# Altium PCB 180222.PcbDoc (part 3 of 5)
Units mil, origin at the board's own origin, x right, y up, seen from the top; angles counter-clockwise.
Board outline 6880.23 x 4505.03 mil, 2 copper layers (Top Layer, Bottom Layer); 136 components, 176 nets, 656 pads, 225 vias.
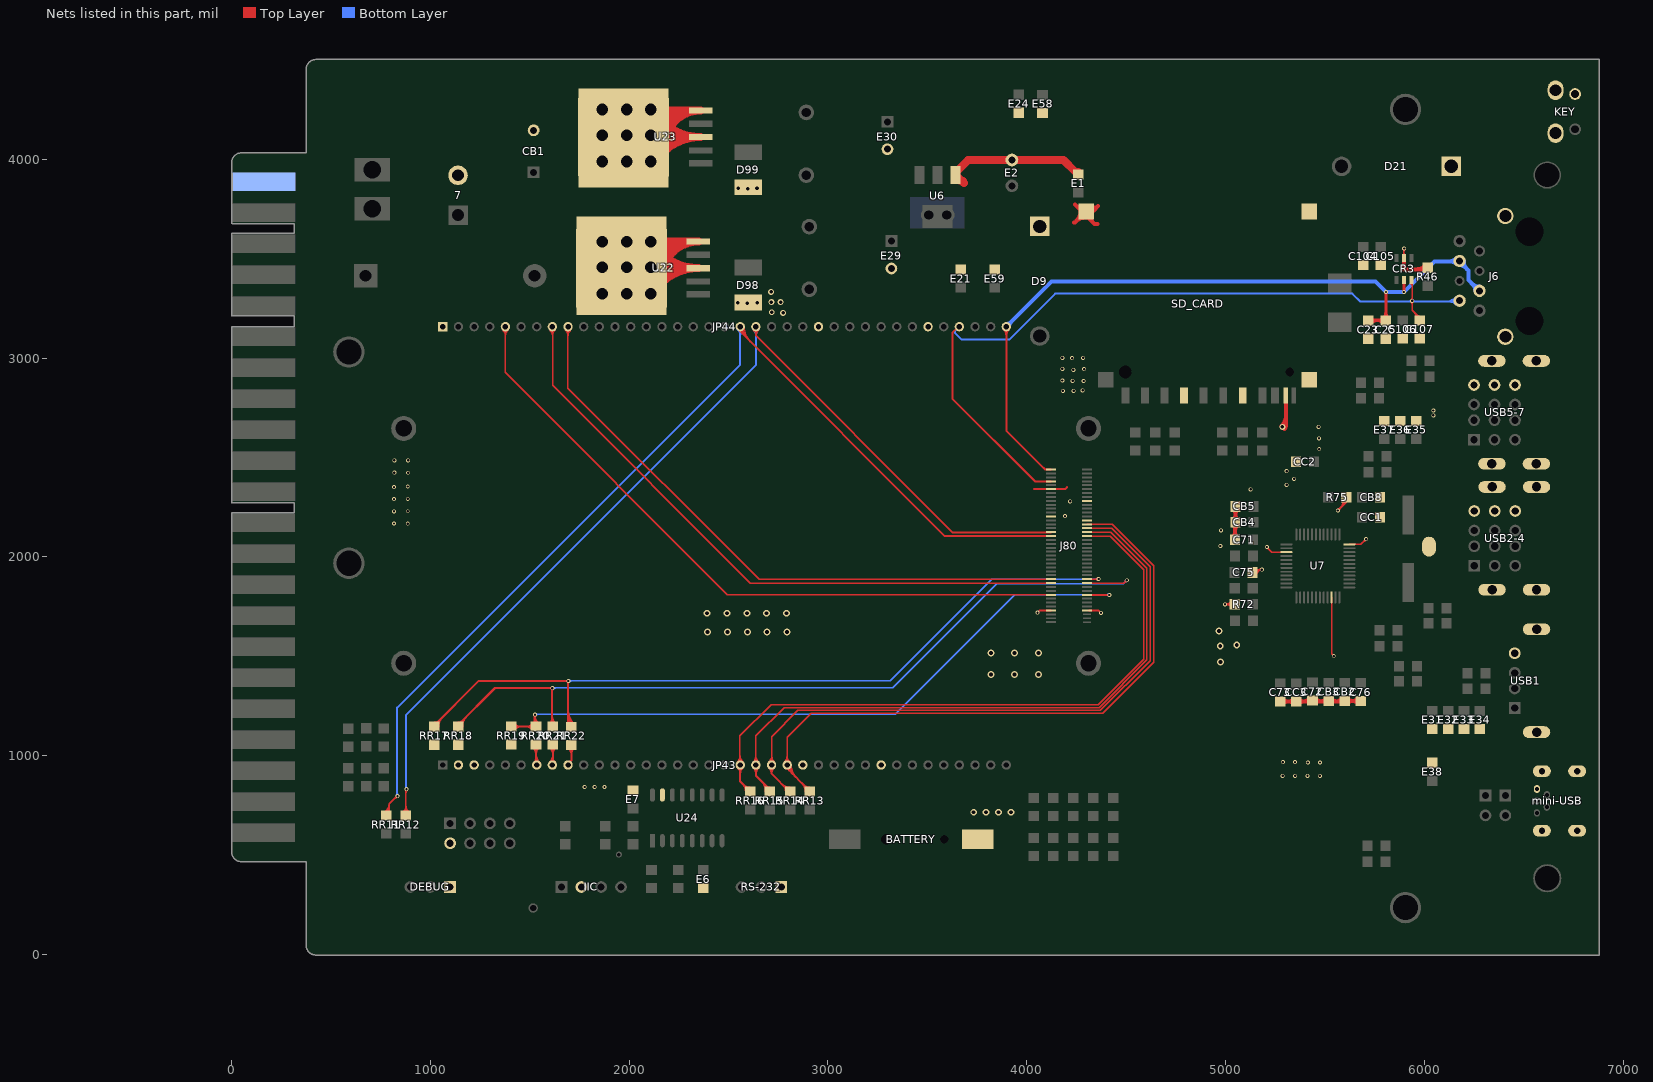
[diagram p3: the nets of this part, all layers, seen from the top]

## Via types
v1: diameter 20, hole 12, Top Layer to Bottom Layer, 169 vias
v2: diameter 30, hole 18, Top Layer to Bottom Layer, 30 vias
v3: diameter 35, hole 20, Top Layer to Bottom Layer, 25 vias
v4: diameter 50, hole 28, Top Layer to Bottom Layer, 1 vias

## Nets (pads, with @x,y where several pads share a name; then routed paths per layer and width w, separated by ;. In a path a pad name is that pad's centre, name@x,y a point inside that pad or via, vN(x,y) a via of type N, cw(c..) or ccw(c..) an arc to the next point about the centre after c; other vN are vias at no path point) (continued)
ETX-: C107.2 CR3.3 J6.2 J80.44 JP44.34 | length 4962.2
  Top Layer w7: CR3.3@5939,3394 5939,3241 C107.2@5978,3202 ; C107.2@5978,3186 C107.2@5978,3189.65 C107.2@5978,3210 ; CR3.3@5930.92,3379.67 cw(c5911.4,3360.16) 5939,3360.16 ; CR3.3@5930.92,3379.67 cw(c5911.4,3360.16) 5939,3360.16 ; CR3.3@5930.92,3379.67 cw(c5911.4,3360.16) 5939,3360.16 ; v1@5934.4,3283.4 cw(c5923.31,3272.31) 5939,3272.31 ; v1@5934.4,3283.4 cw(c5923.31,3272.31) 5939,3272.31 ; v1@5934.4,3283.4 cw(c5923.31,3272.31) 5939,3272.31 ; v1@5934.4,3292.6 ccw(c5923.31,3303.69) 5939,3303.69 ; v1@5934.4,3292.6 ccw(c5923.31,3303.69) 5939,3303.69 ; v1@5934.4,3292.6 ccw(c5923.31,3303.69) 5939,3303.69 ; 5939,3272.31 cw(c5954.69,3272.31) v1@5943.6,3283.4 ; 5939,3272.31 cw(c5954.69,3272.31) v1@5943.6,3283.4 ; 5939,3272.31 cw(c5954.69,3272.31) v1@5943.6,3283.4 ; 5939,3303.69 ccw(c5954.69,3303.69) v1@5943.6,3292.6 ; 5939,3303.69 ccw(c5954.69,3303.69) v1@5943.6,3292.6 ; 5939,3303.69 ccw(c5954.69,3303.69) v1@5943.6,3292.6 ; 5943.74,3236.26 cw(c5899.72,3192.25) C107.2@5961.93,3190.15 ; 5943.74,3236.26 cw(c5899.72,3192.25) C107.2@5961.93,3190.15 ; 5943.74,3236.26 cw(c5899.72,3192.25) C107.2@5961.93,3190.15 ; 5955.14,3224.86 cw(c5921.78,3191.5) C107.2@5968.93,3189.92 ; 5955.14,3224.86 cw(c5921.78,3191.5) C107.2@5968.93,3189.92 ; 5955.14,3224.86 cw(c5921.78,3191.5) C107.2@5968.93,3189.92 ; 5962.07,3217.93 ccw(c5977.01,3232.87) C107.2@5977.01,3211.74 ; 5962.07,3217.93 ccw(c5977.01,3232.87) C107.2@5977.01,3211.74 ; 5962.07,3217.93 ccw(c5977.01,3232.87) C107.2@5977.01,3211.74 ; C107.2@5966.54,3213.46 cw(c5943.85,3190.76) C107.2@5975.93,3189.68 ; C107.2@5966.54,3213.46 cw(c5943.85,3190.76) C107.2@5975.93,3189.68 ; C107.2@5966.54,3213.46 cw(c5943.85,3190.76) C107.2@5975.93,3189.68
  Top Layer w10: JP44.34@3658,3159 3626.5,3127.5 3626.5,2796.54 4042.24,2380.8 J80.44@4122.45,2380.8
  Bottom Layer w10: JP44.34@3661.82,3158.36 3639,3135.55 3639,3128 3673.32,3093.68 3912.68,3093.68 4143.5,3324.5 5639.13,3324.5 5679.63,3284 J6.2@6183,3284 ; 6127.3,3284 cw(c6127.3,3238.3) 6159.62,3270.62 ccw(c6127.3,3238.3) 6127.3,3284 ; 6127.3,3284 ccw(c6127.3,3339.7) 6166.69,3300.31 cw(c6127.3,3339.7) 6127.3,3284 ; 5917.27,3284 ccw(c5917.27,3309.73) 5935.46,3291.54 cw(c5917.27,3309.73) 5917.27,3284 ; v1@5942.53,3291.54 ccw(c5960.73,3309.73) 5960.73,3284 cw(c5960.73,3309.73) v1@5942.53,3291.54 ; 6103.16,3284 ccw(c6103.16,3363.84) 6159.62,3307.38 cw(c6103.16,3363.84) 6103.16,3284
  other v1: 5939,3288
EVDDA: C23.1 C25.2 CR3.2 J6.3 J6.6 J80.41 JP44.37 | length 5517.8
  Top Layer w7: JP44.37@3899,3158.36 JP44.37@3899,3163
  Top Layer w10: JP44.37@3898,3159 3898,2635 4093.14,2439.86 J80.41@4122.45,2439.86 ; JP44.37@3884.87,3145.19 cw(c3853.17,3113.49) 3898,3113.49 ; JP44.37@3884.87,3145.19 cw(c3853.17,3113.49) 3898,3113.49 ; JP44.37@3884.87,3145.19 cw(c3853.17,3113.49) 3898,3113.49 ; 3898,3113.31 cw(c3943.08,3113.31) JP44.37@3911.21,3145.19 ; 3898,3113.31 cw(c3943.08,3113.31) JP44.37@3911.21,3145.19 ; 3898,3113.31 cw(c3943.08,3113.31) JP44.37@3911.21,3145.19 ; 4086.34,2446.66 ccw(c4102.76,2463.09) 4102.76,2439.86 cw(c4102.76,2463.09) 4086.34,2446.66
  Top Layer w15: C23.1@5717,3191 5803,3191 C25.2@5807,3187 ; C25.2@5807,3191 v1@5807,3333 ; v1(5898,3333) CR3.2@5898,3394 ; C23.1@5732.78,3175.11 cw(c5771.13,3136.76) 5771.13,3191 ; C23.1@5732.78,3175.11 cw(c5771.13,3136.76) 5771.13,3191 ; C23.1@5732.78,3175.11 cw(c5771.13,3136.76) 5771.13,3191 ; C23.1@5732.78,3200.7 ccw(c5756.19,3224.11) 5756.19,3191 ; C23.1@5732.78,3200.7 ccw(c5756.19,3224.11) 5756.19,3191 ; C23.1@5732.78,3200.7 ccw(c5756.19,3224.11) 5756.19,3191 ; 5755.66,3191 cw(c5755.66,3139.29) C25.2@5792.22,3175.85 ; 5755.66,3191 cw(c5755.66,3139.29) C25.2@5792.22,3175.85 ; 5755.66,3191 cw(c5755.66,3139.29) C25.2@5792.22,3175.85 ; 5767.02,3191 ccw(c5767.02,3226.64) C25.2@5792.22,3201.44 ; 5767.02,3191 ccw(c5767.02,3226.64) C25.2@5792.22,3201.44 ; 5767.02,3191 ccw(c5767.02,3226.64) C25.2@5792.22,3201.44 ; C25.2@5794.19,3201.44 ccw(c5763.27,3232.36) 5807,3232.36 ; C25.2@5794.19,3201.44 ccw(c5763.27,3232.36) 5807,3232.36 ; C25.2@5794.19,3201.44 ccw(c5763.27,3232.36) 5807,3232.36 ; 5807,3232.28 ccw(c5850.62,3232.28) C25.2@5819.78,3201.44 ; 5807,3232.28 ccw(c5850.62,3232.28) C25.2@5819.78,3201.44 ; 5807,3232.28 ccw(c5850.62,3232.28) C25.2@5819.78,3201.44
  Bottom Layer w20: JP44.37@3898.04,3158.36 4124.68,3385 5730,3385 ; 5723,3385 5756,3385 v1(5808,3333) v1(5898,3333) 6052,3487 J6.6@6176,3487 ; J6.6@6174,3489 J6.6@6176,3487 ; J6.6@6177,3487 J6.6@6176,3487 ; J6.3@6272,3343 6222,3393 6222,3441 J6.6@6176,3487 ; JP44.37@3898.04,3171.98 ccw(c3898.04,3204.87) 3921.29,3181.62 ; JP44.37@3898.04,3171.98 ccw(c3898.04,3204.87) 3921.29,3181.62 ; JP44.37@3898.04,3171.98 ccw(c3898.04,3204.87) 3921.29,3181.62 ; JP44.37@3911.66,3158.36 cw(c3944.55,3158.36) 3921.29,3181.62 ; JP44.37@3911.66,3158.36 cw(c3944.55,3158.36) 3921.29,3181.62 ; JP44.37@3911.66,3158.36 cw(c3944.55,3158.36) 3921.29,3181.62 ; 6122.47,3487 ccw(c6122.47,3544.53) J6.6@6163.15,3503.85 ; 6122.47,3487 ccw(c6122.47,3544.53) J6.6@6163.15,3503.85 ; 6122.47,3487 ccw(c6122.47,3544.53) J6.6@6163.15,3503.85 ; 6132.13,3487 cw(c6132.13,3443.13) J6.6@6163.15,3474.15 ; 6132.13,3487 cw(c6132.13,3443.13) J6.6@6163.15,3474.15 ; 6132.13,3487 cw(c6132.13,3443.13) J6.6@6163.15,3474.15 ; J6.6@6178,3468 cw(c6178,3426.96) 6207.02,3455.98 ; J6.6@6178,3468 cw(c6178,3426.96) 6207.02,3455.98 ; J6.6@6178,3468 cw(c6178,3426.96) 6207.02,3455.98 ; J6.6@6199,3489 ccw(c6259.36,3489) 6216.68,3446.32 ; J6.6@6199,3489 ccw(c6259.36,3489) 6216.68,3446.32 ; J6.6@6199,3489 ccw(c6259.36,3489) 6216.68,3446.32 ; 6238.74,3376.26 ccw(c6278,3415.53) J6.3@6278,3360 ; 6238.74,3376.26 ccw(c6278,3415.53) J6.3@6278,3360 ; 6238.74,3376.26 ccw(c6278,3415.53) J6.3@6278,3360 ; 6243.56,3371.44 cw(c6211.13,3339) J6.3@6257,3339 ; 6243.56,3371.44 cw(c6211.13,3339) J6.3@6257,3339 ; 6243.56,3371.44 cw(c6211.13,3339) J6.3@6257,3339
GND: 7.2 ?.1@1100,560 BATTERY.2 C23.2 C25.1 C71.2 C72.2 C73.2 C75.2 C76.2 C104.1 C105.1 C106.1 C107.1 CB1.2 CB2.2 CB3.2 CB4.2 CB5.2 CB8.2 CC1.2 CC2.2 CC3.2 CR3.5 D9.1 D21.1 D98.1 D99.1 DEBUG.1 E1.2 E2.2 E6.2 E7.1 E21.1 E24.2 E29.2@3320,3451.1 E30.2@3300,4051.1 E31.2 E32.2 E33.2 E34.2 E35.2 E36.2 E37.2 E38.2 E58.1 E59.1 IIC.2 J6.13 J6.14 J80.4 J80.27 J80.32 J80.46 J80.53 J80.77 JP43.2 JP43.3 JP43.24 JP43.29 JP44.1 JP44.25 JP44.32 KEY.1 KEY.3 KEY.4 mini-USB.5 mini-USB.6 pad.0@1773,3453 pad.0@1783,4113 pad.0@1961,3673 pad.0@1962,3256 pad.0@1972,3898 pad.0@1973,4318 pad.0@1983,4123 pad.0@1989,3453 pad.0@6024,2052 pad.2@1865,3586 pad.2@1865,4251 pad.2@1988,3586 pad.2@1988,4251 pad.2@2110,3586 pad.2@2110,4251 pad.3@1865,3457 pad.3@1865,4122 pad.3@1988,3457 pad.3@1988,4122 pad.3@2110,3457 pad.3@2110,4122 pad.4@1865,3324 pad.4@1865,3989 pad.4@1988,3324 pad.4@1988,3989 pad.4@2110,3324 pad.4@2110,3989 pad.A R46.1 R72.2 R75.1 RR17.2 RR18.2 RR19.2 RS-232.1 SD_CARD.3 SD_CARD.6 SD_CARD.11 SD_CARD.13 SD_CARD.14 SD_CARD.15 U6.1 U7.10 U7.24 U7.39 U22.0 U22.3 U22.5 U23.0 U23.3 U23.5 U24.15 USB1.4 USB1.5 USB1.6 USB2-4.4 USB2-4.8 USB2-4.12 USB2-4.13 USB2-4.14 USB2-4.15 USB2-4.16 USB5-7.4 USB5-7.8 USB5-7.12 USB5-7.13 USB5-7.14 USB5-7.15 USB5-7.16 | length 24308.1
  Top Layer w7: R72.2@5047.35,1762 v1(4998,1762) ; C75.2@5136.65,1922 5149.65,1935 v1@5183,1935 ; v1@5204,2053 5232.75,2024.25 U7.39@5306.42,2024.25 ; U7.10@5533.78,1796.89 5533.78,1513.22 5546,1501 v1(5545,1501) ; v1(5566,2234) 5607.91,2275.91 R75.1@5607.91,2300 ; U7.24@5623.35,2063.62 5681.62,2063.62 v1(5708,2090) ; CR3.5@5898,3504 v1@5898,3549 ; v1(4998,1762) cw(c4998,1717.91) R72.2@5030.88,1747.28 ; v1(4998,1762) ccw(c4998,1806.08) R72.2@5030.88,1776.72 ; v1(4998,1762) cw(c4998,1717.91) R72.2@5030.88,1747.28 ; v1(4998,1762) ccw(c4998,1806.08) R72.2@5030.88,1776.72 ; v1(4998,1762) ccw(c4998,1806.08) R72.2@5030.88,1776.72 ; v1(4998,1762) cw(c4998,1717.91) R72.2@5030.88,1747.28 ; v1@5002.6,1757.4 cw(c5013.69,1746.31) 5013.69,1762 ; v1@5002.6,1757.4 cw(c5013.69,1746.31) 5013.69,1762 ; v1@5002.6,1757.4 cw(c5013.69,1746.31) 5013.69,1762 ; v1@5002.6,1766.6 ccw(c5013.69,1777.69) 5013.69,1762 ; v1@5002.6,1766.6 ccw(c5013.69,1777.69) 5013.69,1762 ; v1@5002.6,1766.6 ccw(c5013.69,1777.69) 5013.69,1762 ; 5013.64,1762 cw(c5013.64,1731.88) R72.2@5036.1,1751.95 ; 5013.64,1762 ccw(c5013.64,1792.11) R72.2@5036.1,1772.05 ; 5013.64,1762 cw(c5013.64,1731.88) R72.2@5036.1,1751.95 ; 5013.64,1762 ccw(c5013.64,1792.11) R72.2@5036.1,1772.05 ; 5013.64,1762 ccw(c5013.64,1792.11) R72.2@5036.1,1772.05 ; 5013.64,1762 cw(c5013.64,1731.88) R72.2@5036.1,1751.95 ; 5164.89,1935 ccw(c5164.89,1954.11) v1@5178.4,1940.6 ; 5164.89,1935 ccw(c5164.89,1954.11) v1@5178.4,1940.6 ; 5164.89,1935 ccw(c5164.89,1954.11) v1@5178.4,1940.6 ; 5169.72,1935 cw(c5169.72,1922.72) v1@5178.4,1931.4 ; 5169.72,1935 cw(c5169.72,1922.72) v1@5178.4,1931.4 ; 5169.72,1935 cw(c5169.72,1922.72) v1@5178.4,1931.4 ; v1@5183,1935 ccw(c5183,1908.54) 5157.74,1916.41 cw(c5183,1908.54) v1@5183,1935 ; v1@5208,2043.5 cw(c5208,2030.22) 5217.39,2039.61 ; v1@5208,2043.5 cw(c5208,2030.22) 5217.39,2039.61 ; v1@5208,2043.5 cw(c5208,2030.22) 5217.39,2039.61 ; v1@5214.5,2050 ccw(c5232.61,2050) 5219.8,2037.2 ; v1@5214.5,2050 ccw(c5232.61,2050) 5219.8,2037.2 ; v1@5214.5,2050 ccw(c5232.61,2050) 5219.8,2037.2 ; v1@5566,2240.5 ccw(c5566,2256.19) 5577.1,2245.1 ; v1@5566,2240.5 ccw(c5566,2256.19) 5577.1,2245.1 ; v1@5566,2240.5 ccw(c5566,2256.19) 5577.1,2245.1 ; v1@5572.5,2234 cw(c5588.19,2234) 5577.1,2245.1 ; v1@5572.5,2234 cw(c5588.19,2234) 5577.1,2245.1 ; v1@5572.5,2234 cw(c5588.19,2234) 5577.1,2245.1 ; 5577.56,2245.56 ccw(c5547.28,2275.83) R75.1@5587.27,2291.12 ; 5577.56,2245.56 ccw(c5547.28,2275.83) R75.1@5587.27,2291.12 ; 5577.56,2245.56 ccw(c5547.28,2275.83) R75.1@5587.27,2291.12 ; 5585.19,2253.19 ccw(c5558.32,2280.05) R75.1@5593.81,2293.63 ; 5585.19,2253.19 ccw(c5558.32,2280.05) R75.1@5593.81,2293.63 ; 5585.19,2253.19 ccw(c5558.32,2280.05) R75.1@5593.81,2293.63 ; 5592.82,2260.82 ccw(c5569.36,2284.28) R75.1@5600.35,2296.13 ; 5592.82,2260.82 ccw(c5569.36,2284.28) R75.1@5600.35,2296.13 ; 5592.82,2260.82 ccw(c5569.36,2284.28) R75.1@5600.35,2296.13 ; 5600.45,2268.45 ccw(c5580.41,2288.5) R75.1@5606.89,2298.63 ; 5600.45,2268.45 ccw(c5580.41,2288.5) R75.1@5606.89,2298.63 ; 5600.45,2268.45 ccw(c5580.41,2288.5) R75.1@5606.89,2298.63 ; 5696.9,2078.9 cw(c5708,2067.81) v1@5708,2083.5 ; 5696.9,2078.9 ccw(c5685.81,2090) v1@5701.5,2090 ; 5696.9,2078.9 cw(c5708,2067.81) v1@5708,2083.5 ; 5696.9,2078.9 ccw(c5685.81,2090) v1@5701.5,2090 ; 5696.9,2078.9 ccw(c5685.81,2090) v1@5701.5,2090 ; 5696.9,2078.9 cw(c5708,2067.81) v1@5708,2083.5 ; CR3.5@5893.52,3518.33 ccw(c5882.69,3529.15) 5898,3529.15 ; CR3.5@5893.52,3518.33 ccw(c5882.69,3529.15) 5898,3529.15 ; CR3.5@5893.52,3518.33 ccw(c5882.69,3529.15) 5898,3529.15 ; v1@5894.4,3547.4 cw(c5885.72,3538.72) 5898,3538.72 ; v1@5894.4,3547.4 cw(c5885.72,3538.72) 5898,3538.72 ; v1@5894.4,3547.4 cw(c5885.72,3538.72) 5898,3538.72 ; 5898,3529.15 ccw(c5913.31,3529.15) CR3.5@5902.48,3518.33 ; 5898,3529.15 ccw(c5913.31,3529.15) CR3.5@5902.48,3518.33 ; 5898,3529.15 ccw(c5913.31,3529.15) CR3.5@5902.48,3518.33 ; 5898,3533.89 cw(c5917.11,3533.89) v1@5903.6,3547.4 ; 5898,3533.89 cw(c5917.11,3533.89) v1@5903.6,3547.4 ; 5898,3533.89 cw(c5917.11,3533.89) v1@5903.6,3547.4 ; C75.2@5144.37,1920.58 cw(c5163.97,1914.47) 5163.97,1935 ccw(c5163.97,1914.47) C75.2@5144.37,1920.58 ; C75.2@5151.05,1918.5 cw(c5173.48,1911.5) 5173.48,1935 ccw(c5173.48,1911.5) C75.2@5151.05,1918.5 ; C75.2@5152.27,1938.61 ccw(c5160.97,1947.31) 5160.97,1935 cw(c5160.97,1947.31) C75.2@5152.27,1938.61
  Top Layer w10: 4036.57,2341.43 J80.46@4122.45,2341.43 4193.43,2341.43 4204,2352 ; v1(4055,1720) 4066.2,1731.2 J80.77@4122.45,1731.2 ; J80.4@4313.55,1731.2 4360.8,1731.2 v1@4372,1720
  Top Layer w20: 4239,3683 4243,3683 4304,3744 4338,3744 4360,3766 cw(c4335.76,3790.24) SD_CARD.15@4316.49,3761.89 ; 4243,3774 4342,3675 4356,3675 ; 4245.78,3685.78 cw(c4299.98,3631.59) SD_CARD.15@4299.98,3708.23 ; 4251.52,3691.52 ccw(c4205.44,3737.6) SD_CARD.15@4270.61,3737.6 ; 4253.29,3763.71 ccw(c4269.38,3779.8) SD_CARD.15@4282.74,3761.38 ; SD_CARD.15@4305.24,3745.35 ccw(c4321.92,3769.89) 4342.91,3748.91 ; SD_CARD.15@4325.93,3723.84 ccw(c4354.9,3708.48) 4331.71,3685.29 ; C71.2@5048.35,2086 CB4.2@5048.35,2172 ; CB4.2@5050.35,2174 CB5.2@5050.35,2254 ; C73.2@5276,1273.35 CC3.2@5356,1273.35 5597,1273.35 CB2.2@5600,1276.35 ; 5303.91,2662.91 SD_CARD.11@5303.91,2812.4 ; CB2.2@5609.65,1275.35 C76.2@5680,1275.35 ; CR3.5@5898,3504 5898,3447 R46.1@6016,3447 ; C71.2@5037.33,2098.01 ccw(c5010.72,2124.62) 5048.35,2124.62 ; C71.2@5037.33,2098.01 ccw(c5010.72,2124.62) 5048.35,2124.62 ; C71.2@5037.33,2098.01 ccw(c5010.72,2124.62) 5048.35,2124.62 ; CB4.2@5039.33,2161.99 cw(c5017.54,2140.2) 5048.35,2140.2 ; CB4.2@5039.33,2161.99 cw(c5017.54,2140.2) 5048.35,2140.2 ; CB4.2@5039.33,2161.99 cw(c5017.54,2140.2) 5048.35,2140.2 ; CB4.2@5039.33,2186.01 ccw(c5012.72,2212.62) 5050.35,2212.62 ; CB4.2@5039.33,2186.01 ccw(c5012.72,2212.62) 5050.35,2212.62 ; CB4.2@5039.33,2186.01 ccw(c5012.72,2212.62) 5050.35,2212.62 ; CB5.2@5039.33,2241.99 cw(c5012.72,2215.38) 5050.35,2215.38 ; CB5.2@5039.33,2241.99 cw(c5012.72,2215.38) 5050.35,2215.38 ; CB5.2@5039.33,2241.99 cw(c5012.72,2215.38) 5050.35,2215.38 ; 5048.35,2124.62 ccw(c5085.99,2124.62) C71.2@5059.38,2098.01 ; 5048.35,2124.62 ccw(c5085.99,2124.62) C71.2@5059.38,2098.01 ; 5048.35,2124.62 ccw(c5085.99,2124.62) C71.2@5059.38,2098.01 ; 5048.35,2130.55 cw(c5092.82,2130.55) CB4.2@5061.38,2161.99 ; 5048.35,2130.55 cw(c5092.82,2130.55) CB4.2@5061.38,2161.99 ; 5048.35,2130.55 cw(c5092.82,2130.55) CB4.2@5061.38,2161.99 ; 5050.35,2212.62 ccw(c5087.99,2212.62) CB4.2@5061.38,2186.01 ; 5050.35,2212.62 ccw(c5087.99,2212.62) CB4.2@5061.38,2186.01 ; 5050.35,2212.62 ccw(c5087.99,2212.62) CB4.2@5061.38,2186.01 ; 5050.35,2215.38 cw(c5087.99,2215.38) CB5.2@5061.38,2241.99 ; 5050.35,2215.38 cw(c5087.99,2215.38) CB5.2@5061.38,2241.99 ; 5050.35,2215.38 cw(c5087.99,2215.38) CB5.2@5061.38,2241.99 ; v2@5282.46,2658.54 ccw(c5230.68,2710.32) 5303.91,2710.32 ; v2@5282.46,2658.54 ccw(c5230.68,2710.32) 5303.91,2710.32 ; v2@5282.46,2658.54 ccw(c5230.68,2710.32) 5303.91,2710.32 ; C73.2@5288.01,1262.33 cw(c5314.62,1235.72) 5314.62,1273.35 ; C73.2@5288.01,1262.33 cw(c5314.62,1235.72) 5314.62,1273.35 ; C73.2@5288.01,1262.33 cw(c5314.62,1235.72) 5314.62,1273.35 ; C73.2@5288.01,1284.38 ccw(c5314.62,1310.99) 5314.62,1273.35 ; C73.2@5288.01,1284.38 ccw(c5314.62,1310.99) 5314.62,1273.35 ; C73.2@5288.01,1284.38 ccw(c5314.62,1310.99) 5314.62,1273.35 ; 5296.61,2644.39 ccw(c5278.97,2662.03) 5303.91,2662.03 ; 5296.61,2644.39 ccw(c5278.97,2662.03) 5303.91,2662.03 ; 5296.61,2644.39 ccw(c5278.97,2662.03) 5303.91,2662.03 ; 5317.38,1273.35 cw(c5317.38,1235.72) CC3.2@5343.99,1262.33 ; 5317.38,1273.35 ccw(c5317.38,1310.99) CC3.2@5343.99,1284.38 ; 5317.38,1273.35 cw(c5317.38,1235.72) CC3.2@5343.99,1262.33 ; 5317.38,1273.35 ccw(c5317.38,1310.99) CC3.2@5343.99,1284.38 ; 5317.38,1273.35 ccw(c5317.38,1310.99) CC3.2@5343.99,1284.38 ; 5317.38,1273.35 cw(c5317.38,1235.72) CC3.2@5343.99,1262.33 ; CC3.2@5368.01,1262.33 cw(c5394.62,1235.72) 5394.62,1273.35 ; CC3.2@5368.01,1262.33 cw(c5394.62,1235.72) 5394.62,1273.35 ; CC3.2@5368.01,1262.33 cw(c5394.62,1235.72) 5394.62,1273.35 ; CC3.2@5368.01,1284.38 ccw(c5394.62,1310.99) 5394.62,1273.35 ; CC3.2@5368.01,1284.38 ccw(c5394.62,1310.99) 5394.62,1273.35 ; CC3.2@5368.01,1284.38 ccw(c5394.62,1310.99) 5394.62,1273.35 ; 5389.72,1273.35 ccw(c5389.72,1324.65) C72.2@5425.99,1288.38 ; 5389.72,1273.35 ccw(c5389.72,1324.65) C72.2@5425.99,1288.38 ; 5389.72,1273.35 ccw(c5389.72,1324.65) C72.2@5425.99,1288.38 ; 5409.03,1273.35 cw(c5409.03,1249.37) C72.2@5425.99,1266.33 ; 5409.03,1273.35 cw(c5409.03,1249.37) C72.2@5425.99,1266.33 ; 5409.03,1273.35 cw(c5409.03,1249.37) C72.2@5425.99,1266.33 ; C72.2@5450.01,1266.33 cw(c5466.97,1249.37) 5466.97,1273.35 ; C72.2@5450.01,1266.33 cw(c5466.97,1249.37) 5466.97,1273.35 ; C72.2@5450.01,1266.33 cw(c5466.97,1249.37) 5466.97,1273.35 ; C72.2@5450.01,1288.38 ccw(c5486.28,1324.65) 5486.28,1273.35 ; C72.2@5450.01,1288.38 ccw(c5486.28,1324.65) 5486.28,1273.35 ; C72.2@5450.01,1288.38 ccw(c5486.28,1324.65) 5486.28,1273.35 ; 5474.14,1273.35 ccw(c5474.14,1321.24) CB3.2@5507.99,1287.38 ; 5474.14,1273.35 ccw(c5474.14,1321.24) CB3.2@5507.99,1287.38 ; 5474.14,1273.35 ccw(c5474.14,1321.24) CB3.2@5507.99,1287.38 ; 5488.62,1273.35 cw(c5488.62,1245.96) CB3.2@5507.99,1265.33 ; 5488.62,1273.35 cw(c5488.62,1245.96) CB3.2@5507.99,1265.33 ; 5488.62,1273.35 cw(c5488.62,1245.96) CB3.2@5507.99,1265.33 ; CB3.2@5532.01,1265.33 cw(c5551.38,1245.96) 5551.38,1273.35 ; CB3.2@5532.01,1265.33 cw(c5551.38,1245.96) 5551.38,1273.35 ; CB3.2@5532.01,1265.33 cw(c5551.38,1245.96) 5551.38,1273.35 ; CB3.2@5532.01,1287.38 ccw(c5565.87,1321.24) 5565.87,1273.35 ; CB3.2@5532.01,1287.38 ccw(c5565.87,1321.24) 5565.87,1273.35 ; CB3.2@5532.01,1287.38 ccw(c5565.87,1321.24) 5565.87,1273.35 ; 5554.14,1273.35 ccw(c5554.14,1321.24) CB2.2@5587.99,1287.38 ; 5554.14,1273.35 ccw(c5554.14,1321.24) CB2.2@5587.99,1287.38 ; 5554.14,1273.35 ccw(c5554.14,1321.24) CB2.2@5587.99,1287.38 ; 5568.62,1273.35 cw(c5568.62,1245.96) CB2.2@5587.99,1265.33 ; 5568.62,1273.35 cw(c5568.62,1245.96) CB2.2@5587.99,1265.33 ; 5568.62,1273.35 cw(c5568.62,1245.96) CB2.2@5587.99,1265.33 ; CB2.2@5612.01,1265.33 cw(c5636.21,1241.13) 5636.21,1275.35 ; CB2.2@5612.01,1265.33 cw(c5636.21,1241.13) 5636.21,1275.35 ; CB2.2@5612.01,1265.33 cw(c5636.21,1241.13) 5636.21,1275.35 ; CB2.2@5612.01,1287.38 ccw(c5641.04,1316.41) 5641.04,1275.35 ; CB2.2@5612.01,1287.38 ccw(c5641.04,1316.41) 5641.04,1275.35 ; CB2.2@5612.01,1287.38 ccw(c5641.04,1316.41) 5641.04,1275.35 ; 5641.38,1275.35 cw(c5641.38,1237.72) C76.2@5667.99,1264.33 ; 5641.38,1275.35 ccw(c5641.38,1312.99) C76.2@5667.99,1286.38 ; 5641.38,1275.35 cw(c5641.38,1237.72) C76.2@5667.99,1264.33 ; 5641.38,1275.35 ccw(c5641.38,1312.99) C76.2@5667.99,1286.38 ; 5641.38,1275.35 ccw(c5641.38,1312.99) C76.2@5667.99,1286.38 ; 5641.38,1275.35 cw(c5641.38,1237.72) C76.2@5667.99,1264.33 ; 5960.29,3447 ccw(c5960.29,3511.63) R46.1@6005.99,3465.93 ; 5960.29,3447 ccw(c5960.29,3511.63) R46.1@6005.99,3465.93 ; 5960.29,3447 ccw(c5960.29,3511.63) R46.1@6005.99,3465.93
  Top Layer w39.37: U22.0@2082.38,3604.76 U22.0@2091.24,3613.62 ; U23.0@2082.38,4269.76 U23.0@2091.24,4278.62 ; U22.0@2102.14,3586.86 U22.5@2349.3,3586.86 ; U23.0@2109,4112 U23.3@2360.3,4112 ; U22.0@2116,3453 U22.3@2349.3,3453 ; U23.0@2126.86,4245.86 U23.5@2360.3,4245.86 ; U6.1@3646,3933 3646,3920 3674,3892 ; U6.1@3653,3944 3706,3997 E2.2@3926,3997 4185.68,3997 4244.68,3938 E1.2@4259,3938 ; U22.0@2012.81,3450.36 cw(c2169.04,3429.2) U22.0@2169.04,3586.86 ; U22.0@2012.81,3450.36 cw(c2169.04,3429.2) U22.0@2169.04,3586.86 ; U22.0@2012.81,3450.36 cw(c2169.04,3429.2) U22.0@2169.04,3586.86 ; U23.0@2023.81,4109.36 cw(c2180.04,4088.2) U23.0@2180.04,4245.86 ; U23.0@2023.81,4109.36 cw(c2180.04,4088.2) U23.0@2180.04,4245.86 ; U23.0@2023.81,4109.36 cw(c2180.04,4088.2) U23.0@2180.04,4245.86 ; U22.0@2051.82,3445.07 cw(c2214.1,3423.1) 2214.1,3586.86 ; U22.0@2051.82,3445.07 cw(c2214.1,3423.1) 2214.1,3586.86 ; U22.0@2051.82,3445.07 cw(c2214.1,3423.1) 2214.1,3586.86 ; U23.0@2062.82,4104.07 cw(c2225.1,4082.1) 2225.1,4245.86 ; U23.0@2062.82,4104.07 cw(c2225.1,4082.1) 2225.1,4245.86 ; U23.0@2062.82,4104.07 cw(c2225.1,4082.1) 2225.1,4245.86 ; U22.0@2071.82,3393.65 cw(c2191.07,3303.52) 2191.07,3453 ; U22.0@2071.82,3393.65 cw(c2191.07,3303.52) 2191.07,3453 ; U22.0@2071.82,3393.65 cw(c2191.07,3303.52) 2191.07,3453 ; U22.0@2071.82,3512.35 ccw(c2191.07,3602.48) 2191.07,3453 ; U22.0@2071.82,3512.35 ccw(c2191.07,3602.48) 2191.07,3453 ; U22.0@2071.82,3512.35 ccw(c2191.07,3602.48) 2191.07,3453 ; U23.0@2082.82,4052.65 cw(c2202.07,3962.52) 2202.07,4112 ; U23.0@2082.82,4052.65 cw(c2202.07,3962.52) 2202.07,4112 ; U23.0@2082.82,4052.65 cw(c2202.07,3962.52) 2202.07,4112 ; U23.0@2082.82,4171.35 ccw(c2202.07,4261.48) 2202.07,4112 ; U23.0@2082.82,4171.35 ccw(c2202.07,4261.48) 2202.07,4112 ; U23.0@2082.82,4171.35 ccw(c2202.07,4261.48) 2202.07,4112 ; U22.0@2090.83,3439.79 cw(c2259.16,3416.99) 2259.16,3586.86 ; U22.0@2090.83,3439.79 cw(c2259.16,3416.99) 2259.16,3586.86 ; U22.0@2090.83,3439.79 cw(c2259.16,3416.99) 2259.16,3586.86 ; U23.0@2101.83,4098.79 cw(c2270.16,4075.99) 2270.16,4245.86 ; U23.0@2101.83,4098.79 cw(c2270.16,4075.99) 2270.16,4245.86 ; U23.0@2101.83,4098.79 cw(c2270.16,4075.99) 2270.16,4245.86 ; U22.0@2103.23,3369.91 cw(c2270.18,3243.73) 2270.18,3453 ; U22.0@2103.23,3369.91 cw(c2270.18,3243.73) 2270.18,3453 ; U22.0@2103.23,3369.91 cw(c2270.18,3243.73) 2270.18,3453 ; U22.0@2103.23,3536.09 ccw(c2270.18,3662.27) 2270.18,3453 ; U22.0@2103.23,3536.09 ccw(c2270.18,3662.27) 2270.18,3453 ; U22.0@2103.23,3536.09 ccw(c2270.18,3662.27) 2270.18,3453 ; U23.0@2114.23,4028.91 cw(c2281.18,3902.73) 2281.18,4112 ; U23.0@2114.23,4028.91 cw(c2281.18,3902.73) 2281.18,4112 ; U23.0@2114.23,4028.91 cw(c2281.18,3902.73) 2281.18,4112 ; U23.0@2114.23,4195.09 ccw(c2281.18,4321.27) 2281.18,4112 ; U23.0@2114.23,4195.09 ccw(c2281.18,4321.27) 2281.18,4112 ; U23.0@2114.23,4195.09 ccw(c2281.18,4321.27) 2281.18,4112 ; U22.0@2126.7,3440.3 cw(c2157.37,3409.63) U22.0@2157.37,3453 ; U22.0@2126.7,3440.3 cw(c2157.37,3409.63) U22.0@2157.37,3453 ; U22.0@2126.7,3440.3 cw(c2157.37,3409.63) U22.0@2157.37,3453 ; U22.0@2126.7,3473.7 ccw(c2176.69,3523.69) U22.0@2176.69,3453 ; U22.0@2126.7,3473.7 ccw(c2176.69,3523.69) U22.0@2176.69,3453 ; U22.0@2126.7,3473.7 ccw(c2176.69,3523.69) U22.0@2176.69,3453 ; U22.0@2126.7,3569.3 cw(c2169.1,3526.9) U22.0@2169.1,3586.86 ; U22.0@2126.7,3569.3 cw(c2169.1,3526.9) U22.0@2169.1,3586.86 ; U22.0@2126.7,3569.3 cw(c2169.1,3526.9) U22.0@2169.1,3586.86 ; U22.0@2126.7,3602.7 ccw(c2164.96,3640.96) U22.0@2164.96,3586.86 ; U22.0@2126.7,3602.7 ccw(c2164.96,3640.96) U22.0@2164.96,3586.86 ; U22.0@2126.7,3602.7 ccw(c2164.96,3640.96) U22.0@2164.96,3586.86 ; U23.0@2126.7,4138.7 ccw(c2191.17,4203.17) U23.0@2191.17,4112 ; U23.0@2126.7,4138.7 ccw(c2191.17,4203.17) U23.0@2191.17,4112 ; U23.0@2126.7,4138.7 ccw(c2191.17,4203.17) U23.0@2191.17,4112 ; U23.0@2126.7,4234.3 cw(c2154.61,4206.39) U23.0@2154.61,4245.86 ; U23.0@2126.7,4234.3 cw(c2154.61,4206.39) U23.0@2154.61,4245.86 ; U23.0@2126.7,4234.3 cw(c2154.61,4206.39) U23.0@2154.61,4245.86 ; U23.0@2126.7,4267.7 ccw(c2179.44,4320.44) U23.0@2179.44,4245.86 ; U23.0@2126.7,4267.7 ccw(c2179.44,4320.44) U23.0@2179.44,4245.86 ; U23.0@2126.7,4267.7 ccw(c2179.44,4320.44) U23.0@2179.44,4245.86 ; U22.0@2129.85,3434.51 cw(c2304.22,3410.89) U22.5@2304.22,3586.86 ; U22.0@2129.85,3434.51 cw(c2304.22,3410.89) U22.5@2304.22,3586.86 ; U22.0@2129.85,3434.51 cw(c2304.22,3410.89) U22.5@2304.22,3586.86 ; U22.0@2134.64,3346.17 cw(c2349.28,3183.94) U22.3@2349.3,3453 ; U22.0@2134.64,3346.17 cw(c2349.28,3183.94) U22.3@2349.3,3453 ; U22.0@2134.64,3346.17 cw(c2349.28,3183.94) U22.3@2349.3,3453 ; U22.0@2134.64,3559.83 ccw(c2349.28,3722.06) U22.3@2349.3,3453 ; U22.0@2134.64,3559.83 ccw(c2349.28,3722.06) U22.3@2349.3,3453 ; U22.0@2134.64,3559.83 ccw(c2349.28,3722.06) U22.3@2349.3,3453 ; U23.0@2140.85,4093.51 cw(c2315.22,4069.89) U23.5@2315.22,4245.86 ; U23.0@2140.85,4093.51 cw(c2315.22,4069.89) U23.5@2315.22,4245.86 ; U23.0@2140.85,4093.51 cw(c2315.22,4069.89) U23.5@2315.22,4245.86 ; U23.0@2145.64,4005.17 cw(c2360.28,3842.94) U23.3@2360.3,4112 ; U23.0@2145.64,4005.17 cw(c2360.28,3842.94) U23.3@2360.3,4112 ; U23.0@2145.64,4005.17 cw(c2360.28,3842.94) U23.3@2360.3,4112 ; U23.0@2145.64,4218.83 ccw(c2360.28,4381.06) U23.3@2360.3,4112 ; U23.0@2145.64,4218.83 ccw(c2360.28,4381.06) U23.3@2360.3,4112 ; U23.0@2145.64,4218.83 ccw(c2360.28,4381.06) U23.3@2360.3,4112 ; U22.0@2168.86,3429.22 cw(c2349.29,3404.79) U22.5@2349.3,3586.86 ; U22.0@2168.86,3429.22 cw(c2349.29,3404.79) U22.5@2349.3,3586.86 ; U22.0@2168.86,3429.22 cw(c2349.29,3404.79) U22.5@2349.3,3586.86 ; U23.0@2179.86,4088.22 cw(c2360.29,4063.79) U23.5@2360.3,4245.86 ; U23.0@2179.86,4088.22 cw(c2360.29,4063.79) U23.5@2360.3,4245.86 ; U23.0@2179.86,4088.22 cw(c2360.29,4063.79) U23.5@2360.3,4245.86 ; U6.1@3642.34,3896.19 cw(c3647.58,3843.41) 3685.09,3880.91 ; U6.1@3642.34,3896.19 cw(c3647.58,3843.41) 3685.09,3880.91 ; U6.1@3642.34,3896.19 cw(c3647.58,3843.41) 3685.09,3880.91 ; U6.1@3645.93,3906.24 ccw(c3680.31,3940.61) 3680.31,3892 ; U6.1@3645.93,3906.24 ccw(c3680.31,3940.61) 3680.31,3892 ; U6.1@3645.93,3906.24 ccw(c3680.31,3940.61) 3680.31,3892 ; U6.1@3646.45,3905.64 ccw(c3674,3926.63) 3674,3892 ; U6.1@3646.45,3905.64 ccw(c3674,3926.63) 3674,3892 ; U6.1@3646.45,3905.64 ccw(c3674,3926.63) 3674,3892
  other v1: 1777,843 1827,843 1877,843 5288,899 5350.33,899 5412.67,899 5475,899 5415,966 5476,966 5289,968 5350,968 4374,1719 5183,1936 5208,2050 4975,2055 4978,2134 887,2167.67 818,2168.67 4193,2205 818,2229.67 887,2230 4219,2280 818,2290.67 887,2292.33 5127,2340 818,2351.67 887,2354.67 5308,2363 5346,2393 889,2423.67 820,2424.67 5308,2432 820,2485.67 889,2486 5472,2542 5471,2597 5469,2655 6046,2712 6046,2737 4182,2836 4237,2836 4282,2838 4287,2885 4232,2886 4180,2888 4235,2941 4289,2945 4180,2946 4229,3000 4180,3002 4284,3002 5899,3552
  other v2: 5286,2655 2775,3228 2718,3231 2594,3277 2646,3278 2546,3279 2716,3282 2763,3282 2715,3334 2598,3853 2550,3854 2644,3854
  other v3: 3734,716 3796.33,716 3858.67,716 3921,716 3820,1409 3939.5,1409 4059,1409 4975,1471 3820,1517 3939.5,1517 4059,1517 4974,1552 5057,1558 2395,1623 2495,1623 2595,1623 2695,1623 2795,1623 4967,1628 2393,1717 2492.75,1717 2592.5,1717 2692.25,1717 2792,1717
GP5: JP43.7 RR20.2 | length 274.2
  Top Layer w10: RR20.2@1517.44,1041.79 cw(c1482.29,1006.64) 1532,1006.64 cw(c1581.71,1006.64) RR20.2@1546.56,1041.79 ; JP43.7@1522.67,966.81 ccw(c1500.13,989.34) 1532,989.34 ; JP43.7@1532,957.47 RR20.2@1532,1056.35 ; 1532,983.71 ccw(c1565.9,983.71) JP43.7@1541.93,959.73 ; 1532,1007.85 ccw(c1590.05,1007.85) JP43.7@1549,966.81
GP7: JP43.8 RR21.2 | length 614
  Top Layer w10: JP43.8@1617,957 RR21.2@1617,1056.35 ; JP43.8@1601.41,966.81 ccw(c1563.76,1004.45) 1617,1004.45 ; JP43.8@1601.41,966.81 ccw(c1563.76,1004.45) 1617,1004.45 ; JP43.8@1601.41,966.81 ccw(c1563.76,1004.45) 1617,1004.45 ; RR21.2@1602.44,1041.79 cw(c1567.29,1006.64) 1617,1006.64 ; RR21.2@1602.44,1041.79 cw(c1567.29,1006.64) 1617,1006.64 ; RR21.2@1602.44,1041.79 cw(c1567.29,1006.64) 1617,1006.64 ; JP43.8@1608.48,959.73 ccw(c1587.9,980.31) 1617,980.31 ; JP43.8@1608.48,959.73 ccw(c1587.9,980.31) 1617,980.31 ; JP43.8@1608.48,959.73 ccw(c1587.9,980.31) 1617,980.31 ; 1617,992.74 ccw(c1653.67,992.74) JP43.8@1627.74,966.81 ; 1617,992.74 ccw(c1653.67,992.74) JP43.8@1627.74,966.81 ; 1617,992.74 ccw(c1653.67,992.74) JP43.8@1627.74,966.81 ; 1617,1006.64 cw(c1666.71,1006.64) RR21.2@1631.56,1041.79 ; 1617,1006.64 cw(c1666.71,1006.64) RR21.2@1631.56,1041.79 ; 1617,1006.64 cw(c1666.71,1006.64) RR21.2@1631.56,1041.79
GP9: JP43.9 RR22.2 | length 337.1
  Top Layer w10: JP43.9@1692,959 1710,977 RR22.2@1710,1054.35 ; RR22.2@1695.44,1039.79 cw(c1660.29,1004.64) 1710,1004.64 ; RR22.2@1695.44,1039.79 cw(c1660.29,1004.64) 1710,1004.64 ; RR22.2@1695.44,1039.79 cw(c1660.29,1004.64) 1710,1004.64 ; 1710,1004.64 cw(c1759.71,1004.64) RR22.2@1724.56,1039.79 ; 1710,1004.64 cw(c1759.71,1004.64) RR22.2@1724.56,1039.79 ; 1710,1004.64 cw(c1759.71,1004.64) RR22.2@1724.56,1039.79
GPI5: J80.8 RR19.1 RR20.1 | length 4119.8
  Top Layer w10: RR19.1@1412.09,1146.91 RR20.1@1525.72,1146.91 ; RR19.1@1422.54,1132.35 cw(c1457.7,1097.2) 1457.7,1146.91 cw(c1457.7,1196.62) RR19.1@1422.54,1161.47 ; RR20.1@1516.46,1132.35 ccw(c1481.31,1097.2) 1481.31,1146.91 ccw(c1481.31,1196.62) RR20.1@1516.46,1161.47 ; RR20.1@1525.72,1146.72 RR20.1@1525.72,1146.91 ; 1525.72,1191.45 cw(c1542.71,1191.45) v1@1530.7,1203.46 ; RR20.1@1532,1146.91 RR20.1@1525.72,1146.91 ; J80.8@4303.55,1809.94 v1@4415.94,1809.94 ; RR20.1@1516.46,1161.47 ccw(c1494.09,1183.84) 1525.72,1183.84 ; RR20.1@1516.46,1161.47 ccw(c1494.09,1183.84) 1525.72,1183.84 ; RR20.1@1516.46,1161.47 ccw(c1494.09,1183.84) 1525.72,1183.84 ; RR20.1@1525.72,1146.91 v1@1525.72,1208 ; 1525.72,1184.39 ccw(c1567.32,1184.39) RR20.1@1538.38,1154.51 ; 1525.72,1184.39 ccw(c1567.32,1184.39) RR20.1@1538.38,1154.51 ; 1525.72,1184.39 ccw(c1567.32,1184.39) RR20.1@1538.38,1154.51 ; 1525.72,1195.93 cw(c1537.79,1195.93) 1529.26,1204.46 ccw(c1537.79,1195.93) 1525.72,1195.93 ; 1525.72,1195.93 ccw(c1513.65,1195.93) 1522.19,1204.46 cw(c1513.65,1195.93) 1525.72,1195.93 ; v1@1525.72,1208 ccw(c1590.17,1208) RR20.1@1545.34,1161.7 ; v1@1525.72,1208 ccw(c1590.17,1208) RR20.1@1545.34,1161.7 ; v1@1525.72,1208 ccw(c1590.17,1208) RR20.1@1545.34,1161.7 ; 4401.67,1809.94 cw(c4401.67,1794.67) 4412.46,1805.46 ccw(c4401.67,1794.67) 4401.67,1809.94
  Bottom Layer w7: v1@1522.19,1208 3338,1208 3940,1810 4412,1810 v1@4414,1808 ; v1@1531.76,1202.4 cw(c1545.27,1188.89) 1545.27,1208 ; v1@1531.76,1211.6 ccw(c1540.44,1220.28) 1540.44,1208 ; v1@1530.32,1203.4 cw(c1543.83,1189.89) 1543.83,1209 ccw(c1543.83,1189.89) v1@1530.32,1203.4 ; v1@1530.32,1212.6 ccw(c1539,1221.28) 1539,1209 cw(c1539,1221.28) v1@1530.32,1212.6 ; 4397.89,1810 cw(c4397.89,1790.89) 4411.4,1804.4 ccw(c4397.89,1790.89) 4397.89,1810 ; 4402.72,1810 ccw(c4402.72,1822.28) 4411.4,1813.6 cw(c4402.72,1822.28) 4402.72,1810
  other v1: 1527.16,1207 4416,1809
GPI6: J80.73 JP44.5 | length 3813.8
  Top Layer w7: JP44.5@1377,3155 1377,2928 2495.06,1809.94 J80.73@4122.45,1809.94 ; JP44.5@1364.13,3144.13 cw(c1333.04,3113.05) 1377,3113.05 ; JP44.5@1364.13,3144.13 cw(c1333.04,3113.05) 1377,3113.05 ; JP44.5@1364.13,3144.13 cw(c1333.04,3113.05) 1377,3113.05 ; JP44.5@1369.08,3149.08 cw(c1349.94,3129.95) 1377,3129.95 ; JP44.5@1369.08,3149.08 cw(c1349.94,3129.95) 1377,3129.95 ; JP44.5@1369.08,3149.08 cw(c1349.94,3129.95) 1377,3129.95 ; 1377,3106.51 cw(c1430.2,3106.51) JP44.5@1392.58,3144.13 ; 1377,3106.51 cw(c1430.2,3106.51) JP44.5@1392.58,3144.13 ; 1377,3106.51 cw(c1430.2,3106.51) JP44.5@1392.58,3144.13 ; 1377,3123.41 cw(c1413.3,3123.41) JP44.5@1387.63,3149.08 ; 1377,3123.41 cw(c1413.3,3123.41) JP44.5@1387.63,3149.08 ; 1377,3123.41 cw(c1413.3,3123.41) JP44.5@1387.63,3149.08
GPI7: J80.11 RR18.1 RR21.1 | length 4807.9
  Top Layer w7: J80.11@4303.55,1867.99 4482.99,1867.99 ; 4476,1868 4489,1868 v1(4504,1883) ; 4492.9,1871.9 cw(c4504,1860.81) v1@4504,1876.5 ; 4492.9,1871.9 ccw(c4481.81,1883) v1@4497.5,1883 ; 4492.9,1871.9 cw(c4504,1860.81) v1@4504,1876.5 ; 4492.9,1871.9 ccw(c4481.81,1883) v1@4497.5,1883 ; 4492.9,1871.9 ccw(c4481.81,1883) v1@4497.5,1883 ; 4492.9,1871.9 cw(c4504,1860.81) v1@4504,1876.5 ; J80.11@4324.3,1870.05 ccw(c4329.27,1875.03) 4329.27,1867.99 cw(c4329.27,1875.03) J80.11@4324.3,1870.05
  Top Layer w10: RR18.1@1137,1152 1326,1341 1613.31,1341 RR21.1@1613.31,1146.69 ; RR18.1@1140.99,1166.5 ccw(c1140.99,1191.87) 1158.93,1173.93 ; RR18.1@1151.58,1145.91 cw(c1201.48,1145.91) 1166.19,1181.19 ; RR18.1@1161.58,1145.91 cw(c1235.62,1145.91) 1183.26,1198.26 ; 1600.27,1341 cw(c1600.27,1325.51) v1@1611.22,1336.46 ; 1613.31,1324.45 cw(c1630.3,1324.45) v1@1618.29,1336.46 ; RR21.1@1601.46,1161.47 ccw(c1572.83,1190.09) 1613.31,1190.09 ; RR21.1@1601.46,1161.47 ccw(c1572.83,1190.09) 1613.31,1190.09 ; RR21.1@1601.46,1161.47 ccw(c1572.83,1190.09) 1613.31,1190.09 ; 1613.31,1179 ccw(c1648.11,1179) RR21.1@1623.51,1154.39 ; 1613.31,1179 ccw(c1648.11,1179) RR21.1@1623.51,1154.39 ; 1613.31,1179 ccw(c1648.11,1179) RR21.1@1623.51,1154.39 ; 1613.31,1203.14 ccw(c1672.25,1203.14) RR21.1@1630.58,1161.47 ; 1613.31,1203.14 ccw(c1672.25,1203.14) RR21.1@1630.58,1161.47 ; 1613.31,1203.14 ccw(c1672.25,1203.14) RR21.1@1630.58,1161.47 ; 1613.31,1328.93 cw(c1625.39,1328.93) 1616.85,1337.46 ccw(c1625.39,1328.93) 1613.31,1328.93 ; 1613.31,1328.93 ccw(c1601.24,1328.93) 1609.78,1337.46 cw(c1601.24,1328.93) 1613.31,1328.93
  Bottom Layer w7: v1@1614.05,1342 3326,1342 3850,1866 4487,1866 v1(4504,1883) ; v1@1614.76,1341 v1@1615.76,1340 ; v1@1619.35,1335.4 cw(c1635.28,1319.48) 1635.28,1342 ; v1@1619.35,1344.6 ccw(c1625.62,1350.86) 1625.62,1342 ; 4492.9,1871.9 cw(c4504,1860.81) v1@4504,1876.5 ; 4492.9,1871.9 ccw(c4481.81,1883) v1@4497.5,1883 ; 4492.9,1871.9 cw(c4504,1860.81) v1@4504,1876.5 ; 4492.9,1871.9 ccw(c4481.81,1883) v1@4497.5,1883 ; 4492.9,1871.9 ccw(c4481.81,1883) v1@4497.5,1883 ; 4492.9,1871.9 cw(c4504,1860.81) v1@4504,1876.5 ; v1@1617.91,1336.4 cw(c1631.42,1322.89) 1631.42,1342 ccw(c1631.42,1322.89) v1@1617.91,1336.4 ; v1@1617.91,1345.6 ccw(c1626.59,1354.28) 1626.59,1342 cw(c1626.59,1354.28) v1@1617.91,1345.6
  other v1: 1614.76,1340
GPI8: J80.70 JP44.8 | length 3587.8
  Top Layer w7: JP44.8@1616,3155 1616,2863.96 2610.97,1868.99 J80.70@4122.45,1868.99 ; JP44.8@1600.35,3144.13 cw(c1562.55,3106.34) 1616,3106.34 ; JP44.8@1600.35,3144.13 cw(c1562.55,3106.34) 1616,3106.34 ; JP44.8@1600.35,3144.13 cw(c1562.55,3106.34) 1616,3106.34 ; JP44.8@1605.3,3149.08 cw(c1579.45,3123.24) 1616,3123.24 ; JP44.8@1605.3,3149.08 cw(c1579.45,3123.24) 1616,3123.24 ; JP44.8@1605.3,3149.08 cw(c1579.45,3123.24) 1616,3123.24 ; 1616,3113.23 cw(c1659.71,3113.23) JP44.8@1628.8,3144.13 ; 1616,3113.23 cw(c1659.71,3113.23) JP44.8@1628.8,3144.13 ; 1616,3113.23 cw(c1659.71,3113.23) JP44.8@1628.8,3144.13 ; 1616,3130.12 cw(c1642.81,3130.12) JP44.8@1623.85,3149.08 ; 1616,3130.12 cw(c1642.81,3130.12) JP44.8@1623.85,3149.08 ; 1616,3130.12 cw(c1642.81,3130.12) JP44.8@1623.85,3149.08
GPI9: J80.12 RR17.1 RR22.1 | length 4848.9
  Top Layer w7: J80.12@4303.55,1888.68 v1@4364.32,1888.68 ; 4345.53,1888.68 ccw(c4345.53,1905.47) 4357.4,1893.6 cw(c4345.53,1905.47) 4345.53,1888.68 ; 4347.09,1888.68 cw(c4347.09,1874.09) 4357.4,1884.4 ccw(c4347.09,1874.09) 4347.09,1888.68
  Top Layer w10: RR17.1@1014,1146 1245,1377 1693.31,1377 RR22.1@1693.31,1153.69 ; RR17.1@1020.99,1166.5 ccw(c1020.99,1199.12) 1044.05,1176.05 ccw(c1074.23,1145.91) RR17.1@1031.58,1145.91 ; RR17.1@1041.58,1145.91 cw(c1108.38,1145.91) 1061.14,1193.14 ; 1680.27,1377 cw(c1680.27,1361.51) v1@1691.22,1372.46 ; 1693.31,1360.45 cw(c1710.3,1360.45) v1@1698.29,1372.46 ; 1693.31,1184.24 ccw(c1748.35,1184.24) RR22.1@1709.43,1145.32 ; 1693.31,1184.24 ccw(c1748.35,1184.24) RR22.1@1709.43,1145.32 ; 1693.31,1184.24 ccw(c1748.35,1184.24) RR22.1@1709.43,1145.32 ; 1693.31,1208.38 ccw(c1772.49,1208.38) RR22.1@1716.51,1152.39 ; 1693.31,1208.38 ccw(c1772.49,1208.38) RR22.1@1716.51,1152.39 ; 1693.31,1208.38 ccw(c1772.49,1208.38) RR22.1@1716.51,1152.39 ; 1693.31,1232.52 ccw(c1796.63,1232.52) RR22.1@1723.58,1159.47 ; 1693.31,1232.52 ccw(c1796.63,1232.52) RR22.1@1723.58,1159.47 ; 1693.31,1232.52 ccw(c1796.63,1232.52) RR22.1@1723.58,1159.47 ; 1693.31,1364.93 cw(c1705.39,1364.93) 1696.85,1373.46 ccw(c1705.39,1364.93) 1693.31,1364.93 ; 1693.31,1364.93 ccw(c1681.24,1364.93) 1689.78,1373.46 cw(c1681.24,1364.93) 1693.31,1364.93
  Bottom Layer w7: v1@1694.05,1377 3313,1377 3824,1888 v1@4365,1888 ; v1@1699.35,1371.4 cw(c1712.86,1357.89) 1712.86,1377 ; v1@1699.35,1380.6 ccw(c1708.03,1389.28) 1708.03,1377 ; 1709.01,1377 cw(c1709.01,1392.69) 1697.91,1381.6 ccw(c1709.01,1392.69) 1709.01,1377 ; 1709.01,1377 ccw(c1709.01,1361.31) 1697.91,1372.4 cw(c1709.01,1361.31) 1709.01,1377 ; 4343.89,1888 ccw(c4343.89,1907.11) 4357.4,1893.6 cw(c4343.89,1907.11) 4343.89,1888 ; 4348.72,1888 cw(c4348.72,1875.72) 4357.4,1884.4 ccw(c4348.72,1875.72) 4348.72,1888
  other v1: 1694.76,1376 4362,1889
GPI10: J80.69 JP44.9 | length 3510.8
  Top Layer w7: JP44.9@1693,3155 1693,2850 2654.32,1888.68 J80.69@4122.45,1888.68 ; JP44.9@1679.09,3144.13 cw(c1645.49,3110.54) 1693,3110.54 ; JP44.9@1679.09,3144.13 cw(c1645.49,3110.54) 1693,3110.54 ; JP44.9@1679.09,3144.13 cw(c1645.49,3110.54) 1693,3110.54 ; JP44.9@1684.04,3149.08 cw(c1662.39,3127.44) 1693,3127.44 ; JP44.9@1684.04,3149.08 cw(c1662.39,3127.44) 1693,3127.44 ; JP44.9@1684.04,3149.08 cw(c1662.39,3127.44) 1693,3127.44 ; 1693,3109.02 cw(c1742.65,3109.02) JP44.9@1707.54,3144.13 ; 1693,3109.02 cw(c1742.65,3109.02) JP44.9@1707.54,3144.13 ; 1693,3109.02 cw(c1742.65,3109.02) JP44.9@1707.54,3144.13 ; 1693,3125.92 cw(c1725.75,3125.92) JP44.9@1702.59,3149.08 ; 1693,3125.92 cw(c1725.75,3125.92) JP44.9@1702.59,3149.08 ; 1693,3125.92 cw(c1725.75,3125.92) JP44.9@1702.59,3149.08
GPIO1: 
GPIO2: 
GPIO3: 
GPIO4: 
GPIO11: J80.58 JP44.20 RR11.1 | length 6735.8
  Top Layer w7: RR11.1@778,698.91 RR11.1@794,714.91 ; JP44.20@2559,3135 JP44.20@2559,3155 ; JP44.20@2551.58,3158.36 ccw(c2590.06,3158.36) 2562.85,3131.15 ; JP44.20@2551.58,3158.36 ccw(c2590.06,3158.36) 2562.85,3131.15 ; JP44.20@2551.58,3158.36 ccw(c2590.06,3158.36) 2562.85,3131.15 ; JP44.20@2558.58,3158.36 ccw(c2613.96,3158.36) 2574.8,3119.2 ; JP44.20@2558.58,3158.36 ccw(c2613.96,3158.36) 2574.8,3119.2 ; JP44.20@2558.58,3158.36 ccw(c2613.96,3158.36) 2574.8,3119.2 ; JP44.20@2565.58,3158.36 ccw(c2637.86,3158.36) 2586.75,3107.25 ; JP44.20@2565.58,3158.36 ccw(c2637.86,3158.36) 2586.75,3107.25 ; JP44.20@2565.58,3158.36 ccw(c2637.86,3158.36) 2586.75,3107.25 ; JP44.20@2572.58,3158.36 ccw(c2661.76,3158.36) 2598.7,3095.3 ; JP44.20@2572.58,3158.36 ccw(c2661.76,3158.36) 2598.7,3095.3 ; JP44.20@2572.58,3158.36 ccw(c2661.76,3158.36) 2598.7,3095.3 ; JP44.20@2579.58,3158.36 ccw(c2685.66,3158.36) 2610.65,3083.35 ; JP44.20@2579.58,3158.36 ccw(c2685.66,3158.36) 2610.65,3083.35 ; JP44.20@2579.58,3158.36 ccw(c2685.66,3158.36) 2610.65,3083.35
  Top Layer w10: RR11.1@794,714.91 794,759 ; 820.81,785.81 cw(c835.76,770.86) v1@835.76,792 ; v1@834,799 794,759 ; JP44.20@2559,3135 3588.79,2105.21 J80.58@4122.45,2105.21 ; RR11.1@769.1,716.97 ccw(c746.08,759) 794,759 ; RR11.1@769.1,716.97 ccw(c746.08,759) 794,759 ; RR11.1@769.1,716.97 ccw(c746.08,759) 794,759 ; RR11.1@773.9,708.19 ccw(c755.32,742.12) 794,742.12 ; RR11.1@773.9,708.19 ccw(c755.32,742.12) 794,742.12 ; RR11.1@773.9,708.19 ccw(c755.32,742.12) 794,742.12 ; RR11.1@778.7,699.42 ccw(c764.56,725.24) 794,725.24 ; RR11.1@778.7,699.42 ccw(c764.56,725.24) 794,725.24 ; RR11.1@778.7,699.42 ccw(c764.56,725.24) 794,725.24 ; 823.53,788.53 cw(c834.31,777.76) 834.31,793 ccw(c834.31,777.76) 823.53,788.53
  Bottom Layer w10: v1@834,799 834,1242 2559.46,2967.46 JP44.20@2559.46,3158.36 ; 834,813.31 ccw(c852.06,813.31) v1@839.29,800.54 ; JP44.20@2546.29,3145.19 cw(c2514.5,3113.4) 2559.46,3113.4 ; JP44.20@2546.29,3145.19 cw(c2514.5,3113.4) 2559.46,3113.4 ; JP44.20@2546.29,3145.19 cw(c2514.5,3113.4) 2559.46,3113.4 ; 2559.46,3113.4 cw(c2604.41,3113.4) JP44.20@2572.62,3145.19 ; 2559.46,3113.4 cw(c2604.41,3113.4) JP44.20@2572.62,3145.19 ; 2559.46,3113.4 cw(c2604.41,3113.4) JP44.20@2572.62,3145.19 ; v1@830.78,801.54 ccw(c823,809.31) 834,809.31 cw(c823,809.31) v1@830.78,801.54 ; 834,810.83 ccw(c847.14,810.83) 837.85,801.54 cw(c847.14,810.83) 834,810.83
  other v1: 835.76,797
GPIO12: J80.57 JP44.21 RR12.1 | length 6226.6
  Top Layer w7: RR12.1@878,698.91 v1@878,831 ; 878,809.66 cw(c903.1,809.66) v1@885.35,827.4 ; JP44.21@2639,3155 2639,3113 ; 4094.31,2122.9 ccw(c4094.31,2133.35) 4101.7,2125.96 cw(c4096.73,2130.93) 4096.73,2123.9 ; RR12.1@862.38,714.53 ccw(c824.67,752.24) 878,752.24 ; RR12.1@862.38,714.53 ccw(c824.67,752.24) 878,752.24 ; RR12.1@862.38,714.53 ccw(c824.67,752.24) 878,752.24 ; RR12.1@867.33,709.58 ccw(c841.57,735.34) 878,735.34 ; RR12.1@867.33,709.58 ccw(c841.57,735.34) 878,735.34 ; RR12.1@867.33,709.58 ccw(c841.57,735.34) 878,735.34 ; 878,735.34 ccw(c914.43,735.34) RR12.1@888.67,709.58 ; 878,735.34 ccw(c914.43,735.34) RR12.1@888.67,709.58 ; 878,735.34 ccw(c914.43,735.34) RR12.1@888.67,709.58 ; 878,752.24 ccw(c931.33,752.24) RR12.1@893.62,714.53 ; 878,752.24 ccw(c931.33,752.24) RR12.1@893.62,714.53 ; 878,752.24 ccw(c931.33,752.24) RR12.1@893.62,714.53 ; JP44.21@2625.13,3143.06 cw(c2599.48,3113) 2639,3113 ; JP44.21@2625.13,3143.06 cw(c2599.48,3113) 2639,3113 ; JP44.21@2625.13,3143.06 cw(c2599.48,3113) 2639,3113 ; JP44.21@2629.68,3148.38 cw(c2612.43,3128.17) 2639,3128.17 ; JP44.21@2629.68,3148.38 cw(c2612.43,3128.17) 2639,3128.17 ; JP44.21@2629.68,3148.38 cw(c2612.43,3128.17) 2639,3128.17 ; 2639,3113 cw(c2681.81,3113) JP44.21@2652.14,3143.86 ; 2639,3113 cw(c2681.81,3113) JP44.21@2652.14,3143.86 ; 2639,3113 cw(c2681.81,3113) JP44.21@2652.14,3143.86 ; 2639,3129.43 cw(c2666,3129.43) JP44.21@2647.29,3148.9 ; 2639,3129.43 cw(c2666,3129.43) JP44.21@2647.29,3148.9 ; 2639,3129.43 cw(c2666,3129.43) JP44.21@2647.29,3148.9 ; v1@874.72,828.4 cw(c866.8,820.48) 878,820.48 ccw(c866.8,820.48) v1@874.72,828.4 ; 878,814.13 cw(c898.18,814.13) 883.91,828.4 ccw(c898.18,814.13) 878,814.13
  Top Layer w10: 2639,3113 3629,2123 3630,2123 3630.1,2122.9 J80.57@4122.45,2122.9
  Bottom Layer w10: v1@878,829 878,1205 2638.2,2965.2 JP44.21@2638.2,3158.36 ; 878,850.72 ccw(c899.48,850.72) v1@884.29,835.54 ; JP44.21@2625.03,3145.19 cw(c2593.24,3113.4) 2638.2,3113.4 ; JP44.21@2625.03,3145.19 cw(c2593.24,3113.4) 2638.2,3113.4 ; JP44.21@2625.03,3145.19 cw(c2593.24,3113.4) 2638.2,3113.4 ; 2638.2,3113.4 cw(c2683.15,3113.4) JP44.21@2651.36,3145.19 ; 2638.2,3113.4 cw(c2683.15,3113.4) JP44.21@2651.36,3145.19 ; 2638.2,3113.4 cw(c2683.15,3113.4) JP44.21@2651.36,3145.19 ; 878,848.24 ccw(c894.56,848.24) 882.85,836.54 cw(c894.56,848.24) 878,848.24
  other v1: 880.76,832
GPO1: J80.26 JP43.23 RR13.1 | length 4357.5
  Top Layer w7: JP43.23@2795,949 2795,1092 2917,1214 4383,1214 4639,1470 4639,1956 4430.73,2164.27 J80.26@4303.55,2164.27 ; JP43.23@2781.45,967.87 ccw(c2748.73,1000.58) 2795,1000.58 ; JP43.23@2781.45,967.87 ccw(c2748.73,1000.58) 2795,1000.58 ; JP43.23@2781.45,967.87 ccw(c2748.73,1000.58) 2795,1000.58 ; JP43.23@2786.4,962.92 ccw(c2765.63,983.69) 2795,983.69 ; JP43.23@2786.4,962.92 ccw(c2765.63,983.69) 2795,983.69 ; JP43.23@2786.4,962.92 ccw(c2765.63,983.69) 2795,983.69 ; 2795,986.95 ccw(c2828.99,986.95) JP43.23@2804.95,962.92 ; 2795,986.95 ccw(c2828.99,986.95) JP43.23@2804.95,962.92 ; 2795,986.95 ccw(c2828.99,986.95) JP43.23@2804.95,962.92 ; 2795,1003.85 ccw(c2845.89,1003.85) JP43.23@2809.9,967.87 ; 2795,1003.85 ccw(c2845.89,1003.85) JP43.23@2809.9,967.87 ; 2795,1003.85 ccw(c2845.89,1003.85) JP43.23@2809.9,967.87
  Top Layer w10: JP43.23@2795.68,953.64 2795.68,936.32 RR13.1@2902,830 ; JP43.23@2794.3,953.64 ccw(c2832.77,953.64) 2805.57,926.43 ; JP43.23@2794.3,953.64 ccw(c2832.77,953.64) 2805.57,926.43 ; JP43.23@2794.3,953.64 ccw(c2832.77,953.64) 2805.57,926.43 ; JP43.23@2804.3,953.64 ccw(c2866.91,953.64) 2822.64,909.36 ; JP43.23@2804.3,953.64 ccw(c2866.91,953.64) 2822.64,909.36 ; JP43.23@2804.3,953.64 ccw(c2866.91,953.64) 2822.64,909.36 ; JP43.23@2814.3,953.64 ccw(c2901.05,953.64) 2839.71,892.29 ; JP43.23@2814.3,953.64 ccw(c2901.05,953.64) 2839.71,892.29 ; JP43.23@2814.3,953.64 ccw(c2901.05,953.64) 2839.71,892.29 ; 2869.98,862.02 cw(c2827.87,819.91) RR13.1@2887.43,819.91 ; 2869.98,862.02 cw(c2827.87,819.91) RR13.1@2887.43,819.91 ; 2869.98,862.02 cw(c2827.87,819.91) RR13.1@2887.43,819.91 ; 2879.83,852.17 ccw(c2908.02,880.36) RR13.1@2908.02,840.5 ; 2879.83,852.17 ccw(c2908.02,880.36) RR13.1@2908.02,840.5 ; 2879.83,852.17 ccw(c2908.02,880.36) RR13.1@2908.02,840.5 ; RR13.1@2887.05,844.95 cw(c2862.01,819.91) RR13.1@2897.43,819.91 ; RR13.1@2887.05,844.95 cw(c2862.01,819.91) RR13.1@2897.43,819.91 ; RR13.1@2887.05,844.95 cw(c2862.01,819.91) RR13.1@2897.43,819.91
GPO2: J80.25 JP43.22 RR14.1 | length 4135.6
  Top Layer w7: JP43.22@2719,948 2719,1097 2850,1228 4370.4,1228 4621,1478.6 4621,1951 4427.42,2144.58 J80.25@4303.55,2144.58 ; JP43.22@2702.71,967.87 ccw(c2663.37,1007.2) 2719,1007.2 ; JP43.22@2702.71,967.87 ccw(c2663.37,1007.2) 2719,1007.2 ; JP43.22@2702.71,967.87 ccw(c2663.37,1007.2) 2719,1007.2 ; JP43.22@2707.66,962.92 ccw(c2680.27,990.3) 2719,990.3 ; JP43.22@2707.66,962.92 ccw(c2680.27,990.3) 2719,990.3 ; JP43.22@2707.66,962.92 ccw(c2680.27,990.3) 2719,990.3 ; 2719,980.33 ccw(c2743.63,980.33) JP43.22@2726.21,962.92 ; 2719,980.33 ccw(c2743.63,980.33) JP43.22@2726.21,962.92 ; 2719,980.33 ccw(c2743.63,980.33) JP43.22@2726.21,962.92 ; 2719,997.23 ccw(c2760.53,997.23) JP43.22@2731.16,967.87 ; 2719,997.23 ccw(c2760.53,997.23) JP43.22@2731.16,967.87 ; 2719,997.23 ccw(c2760.53,997.23) JP43.22@2731.16,967.87
  Top Layer w10: JP43.22@2716.94,953.64 2716.94,910.06 ; RR14.1@2807,820 2716.94,910.06 ; JP43.22@2704.07,940.18 cw(c2675.27,910.07) 2716.94,910.07 ; JP43.22@2704.07,940.18 cw(c2675.27,910.07) 2716.94,910.07 ; JP43.22@2704.07,940.18 cw(c2675.27,910.07) 2716.94,910.07 ; 2716.94,910.07 cw(c2758.6,910.07) JP43.22@2729.81,940.18 ; 2716.94,910.07 cw(c2758.6,910.07) JP43.22@2729.81,940.18 ; 2716.94,910.07 cw(c2758.6,910.07) JP43.22@2729.81,940.18 ; 2770.58,856.42 ccw(c2809.02,894.85) RR14.1@2809.02,840.5 ; 2770.58,856.42 ccw(c2809.02,894.85) RR14.1@2809.02,840.5 ; 2770.58,856.42 ccw(c2809.02,894.85) RR14.1@2809.02,840.5 ; 2775.23,851.77 cw(c2743.36,819.91) RR14.1@2788.43,819.91 ; 2775.23,851.77 cw(c2743.36,819.91) RR14.1@2788.43,819.91 ; 2775.23,851.77 cw(c2743.36,819.91) RR14.1@2788.43,819.91 ; RR14.1@2787.66,839.34 ccw(c2809.02,860.71) RR14.1@2809.02,830.5 ; RR14.1@2787.66,839.34 ccw(c2809.02,860.71) RR14.1@2809.02,830.5 ; RR14.1@2787.66,839.34 ccw(c2809.02,860.71) RR14.1@2809.02,830.5
GPO3: J80.24 JP43.21 RR15.1 | length 4211.3
  Top Layer w7: JP43.21@2638,954 2638,1100 2780,1242 4364.6,1242 4602,1479.4 4602,1480.2 4604,1482.2 4604,1944 4423.1,2124.9 J80.24@4303.55,2124.9 ; JP43.21@2623.97,967.87 ccw(c2590.09,1001.74) 2638,1001.74 ; JP43.21@2623.97,967.87 ccw(c2590.09,1001.74) 2638,1001.74 ; JP43.21@2623.97,967.87 ccw(c2590.09,1001.74) 2638,1001.74 ; JP43.21@2628.92,962.92 ccw(c2606.99,984.84) 2638,984.84 ; JP43.21@2628.92,962.92 ccw(c2606.99,984.84) 2638,984.84 ; JP43.21@2628.92,962.92 ccw(c2606.99,984.84) 2638,984.84 ; 2638,985.79 ccw(c2670.35,985.79) JP43.21@2647.47,962.92 ; 2638,985.79 ccw(c2670.35,985.79) JP43.21@2647.47,962.92 ; 2638,985.79 ccw(c2670.35,985.79) JP43.21@2647.47,962.92 ; 2638,1002.69 ccw(c2687.25,1002.69) JP43.21@2652.42,967.87 ; 2638,1002.69 ccw(c2687.25,1002.69) JP43.21@2652.42,967.87 ; 2638,1002.69 ccw(c2687.25,1002.69) JP43.21@2652.42,967.87
  Top Layer w10: JP43.21@2638.2,953.64 2638.2,900.8 RR15.1@2711,828 ; JP43.21@2625.03,940.47 cw(c2593.24,908.68) 2638.2,908.68 ; JP43.21@2625.03,940.47 cw(c2593.24,908.68) 2638.2,908.68 ; JP43.21@2625.03,940.47 cw(c2593.24,908.68) 2638.2,908.68 ; 2638.2,908.68 cw(c2683.15,908.68) JP43.21@2651.36,940.47 ; 2638.2,908.68 cw(c2683.15,908.68) JP43.21@2651.36,940.47 ; 2638.2,908.68 cw(c2683.15,908.68) JP43.21@2651.36,940.47 ; 2665.03,873.97 cw(c2610.97,819.91) RR15.1@2687.43,819.91 ; 2665.03,873.97 cw(c2610.97,819.91) RR15.1@2687.43,819.91 ; 2665.03,873.97 cw(c2610.97,819.91) RR15.1@2687.43,819.91 ; 2682.1,856.9 cw(c2645.11,819.91) RR15.1@2697.43,819.91 ; 2682.1,856.9 cw(c2645.11,819.91) RR15.1@2697.43,819.91 ; 2682.1,856.9 cw(c2645.11,819.91) RR15.1@2697.43,819.91 ; 2691.78,847.22 ccw(c2708.02,863.46) RR15.1@2708.02,840.5 ; 2691.78,847.22 ccw(c2708.02,863.46) RR15.1@2708.02,840.5 ; 2691.78,847.22 ccw(c2708.02,863.46) RR15.1@2708.02,840.5
GPO4: J80.23 JP43.20 RR16.1 | length 4195.3
  Top Layer w7: JP43.20@2558,952 2558,1100 2715,1257 4359.8,1257 4588,1485.2 4588,1486 4590,1488 4590,1936 4420.79,2105.21 J80.23@4303.55,2105.21 ; JP43.20@2545.23,967.87 ccw(c2514.39,998.7) 2558,998.7 ; JP43.20@2545.23,967.87 ccw(c2514.39,998.7) 2558,998.7 ; JP43.20@2545.23,967.87 ccw(c2514.39,998.7) 2558,998.7 ; JP43.20@2550.18,962.92 ccw(c2531.29,981.8) 2558,981.8 ; JP43.20@2550.18,962.92 ccw(c2531.29,981.8) 2558,981.8 ; JP43.20@2550.18,962.92 ccw(c2531.29,981.8) 2558,981.8 ; 2558,988.83 ccw(c2594.65,988.83) JP43.20@2568.73,962.92 ; 2558,988.83 ccw(c2594.65,988.83) JP43.20@2568.73,962.92 ; 2558,988.83 ccw(c2594.65,988.83) JP43.20@2568.73,962.92 ; 2558,1005.73 ccw(c2611.55,1005.73) JP43.20@2573.68,967.87 ; 2558,1005.73 ccw(c2611.55,1005.73) JP43.20@2573.68,967.87 ; 2558,1005.73 ccw(c2611.55,1005.73) JP43.20@2573.68,967.87
  Top Layer w10: JP43.20@2559.46,953.64 2559.46,870.54 RR16.1@2609,821 ; JP43.20@2546.29,940.47 cw(c2514.5,908.68) 2559.46,908.68 ; JP43.20@2546.29,940.47 cw(c2514.5,908.68) 2559.46,908.68 ; JP43.20@2546.29,940.47 cw(c2514.5,908.68) 2559.46,908.68 ; 2559.46,908.68 cw(c2604.41,908.68) JP43.20@2572.62,940.47 ; 2559.46,908.68 cw(c2604.41,908.68) JP43.20@2572.62,940.47 ; 2559.46,908.68 cw(c2604.41,908.68) JP43.20@2572.62,940.47 ; 2571.4,858.6 cw(c2532.7,819.91) RR16.1@2587.43,819.91 ; 2571.4,858.6 cw(c2532.7,819.91) RR16.1@2587.43,819.91 ; 2571.4,858.6 cw(c2532.7,819.91) RR16.1@2587.43,819.91 ; 2576.41,853.59 ccw(c2608.02,885.19) RR16.1@2608.02,840.5 ; 2576.41,853.59 ccw(c2608.02,885.19) RR16.1@2608.02,840.5 ; 2576.41,853.59 ccw(c2608.02,885.19) RR16.1@2608.02,840.5 ; RR16.1@2588.47,841.53 cw(c2566.84,819.91) RR16.1@2597.43,819.91 ; RR16.1@2588.47,841.53 cw(c2566.84,819.91) RR16.1@2597.43,819.91 ; RR16.1@2588.47,841.53 cw(c2566.84,819.91) RR16.1@2597.43,819.91